# Allegro board Transceiver.brd
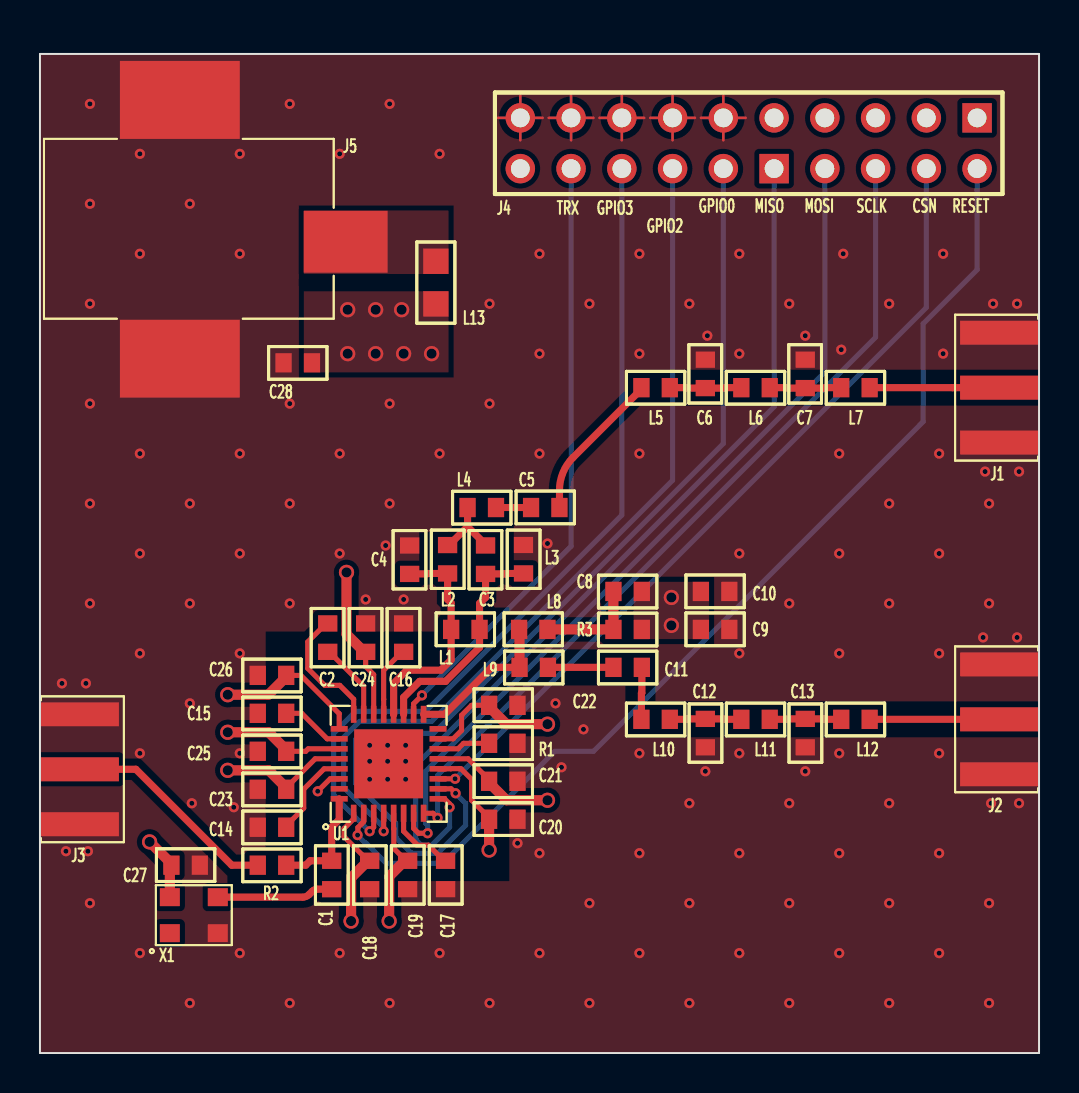
[diagram p0: board, top side]
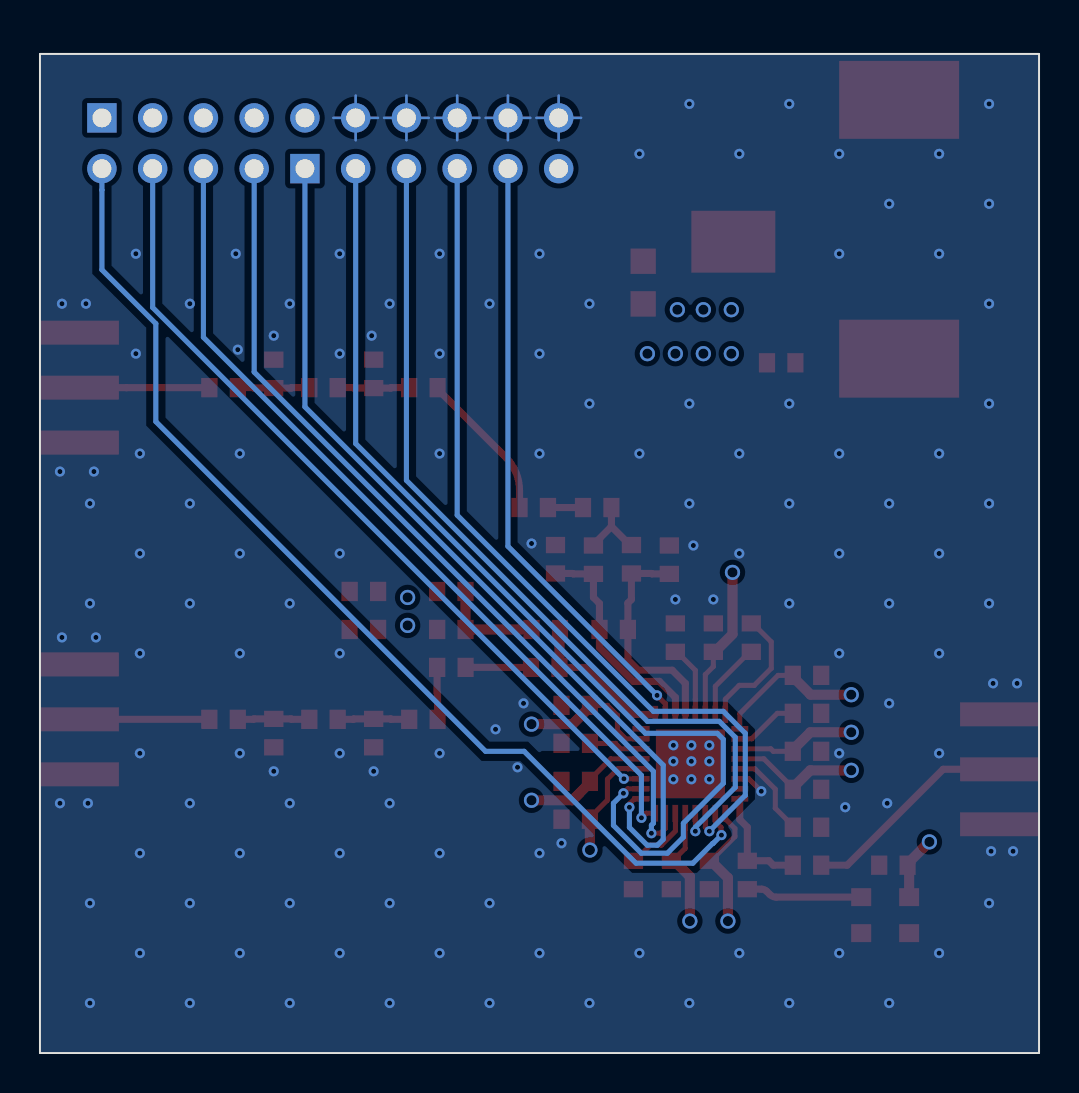
[diagram p1: board, bottom side, seen from below]

Outline 50 x 50 mm; copper layers: TOP, INNER 1, INNER 2, BOTTOM. Coordinates in mm from the lower left corner of the outline.
Outline path: 0,50 0,0 50,0 50,50 0,50

## Design rules (mm)
constraint set DEFAULT: min track width 0.127

## Placement (name value [footprint] x y rotation side)
C1  22p  [SMC0603]  14.6 8.2 90 top
C2  1.5n  [SMC0603]  14.4 21.5 270 top
C3  5.1p  [SMC0603]  22.3 25.4 270 top
C4  5.1p  [SMC0603]  18.5 25.4 270 top
C5  5.1p  [SMC0603]  26 27.3 180 top
C6  6.8p  [SMC0603]  33.3 34.7 270 top
C7  6.8p  [SMC0603]  38.3 34.7 270 top
C8  56p  [SMC0603]  28.7 23.1 0 top
C9  100p  [SMC0603]  34.5 21.2 180 top
C10  10n  [SMC0603]  34.5 23.1 180 top
C11  39p  [SMC0603]  28.7 19.3 0 top
C12  6.8p  [SMC0603]  33.3 15.3 90 top
C13  6.8p  [SMC0603]  38.3 15.3 90 top
C14  47n  [SMC0603]  10.9 11.3 0 top
C15  47n  [SMC0603]  10.9 17 0 top
C16  10n  [SMC0603]  18.2 21.5 270 top
C17  220n  [SMC0603]  20.3 8.2 90 top
C18  47n  [SMC0603]  16.5 8.2 90 top
C19  47n  [SMC0603]  18.4 8.2 90 top
C20  47n  [SMC0603]  23.9 11.7 180 top
C21  47n  [SMC0603]  23.9 13.6 180 top
C22  47n  [SMC0603]  23.9 17.4 180 top
C23  47n  [SMC0603]  10.9 13.2 0 top
C24  47n  [SMC0603]  16.3 21.5 270 top
C25  47n  [SMC0603]  10.9 15.1 0 top
C26  47n  [SMC0603]  10.9 18.9 0 top
C27  100n  [SMC0603]  8 9.4 180 top
C28  2.2u  [SMC0603]  12.19 34.54 0 top
J1  SMA_EDGE  [CON_SMA_EDGE]  48 33.3 180 top
J2  SMA_EDGE  [CON_SMA_EDGE]  48 16.7 180 top
J3  SMA_EDGE  [CON_SMA_EDGE]  2 14.2 0 top
J4  CON20A  [BLKCON100VHTM2OEW20020]  46.9 46.8 180 top
J5  -  [PJ-036AH-SMT-TR]  15.3 40.6 0 top
L1  56n  [SMC0603]  22 21.2 180 top
L2  27n  [SMC0603]  20.4 24 90 top
L3  27n  [SMC0603]  24.2 24 90 top
L4  15n  [SMC0603]  21.4 27.3 0 top
L5  18n  [SMC0603]  30.1 33.3 0 top
L6  39n  [SMC0603]  35.1 33.3 0 top
L7  21n  [SMC0603]  40.1 33.3 0 top
L8  56n  [SMC0603]  25.4 21.2 180 top
L9  15n  [SMC0603]  24 19.3 0 top
L10  21n  [SMC0603]  30.1 16.7 0 top
L11  39n  [SMC0603]  35.1 16.7 0 top
L12  18n  [SMC0603]  40.1 16.7 0 top
L13  BLM21PG221SN1D  [SMC0805]  19.81 39.62 270 top
R1  56k  [SMC0603]  23.9 15.5 180 top
R2  0  [SMC0603]  10.9 9.4 0 top
R3  18  [SMC0603]  28.7 21.2 0 top
U1  CC1200  [QFN_5X5_32P]  15.7 12 90 top
X1  TXETBLSANF-40.000000  [TXETBLSANF]  6.5 6 0 top

## Library data of the parts
C1-C28 = C
J1-J3 = SMA_EDGE
J4 = CON20A
J5 = PJ-036AH-SMT-TR
L1-L13 = L_0
R1-R3 = R
U1 = CC1200_1
X1 = TXETBLSANF-40_0.000000

## Footprints (pads in the part's own frame, mm; a bottom-side part is the same pattern mirrored in y, then rotated)
BLKCON100VHTM2OEW20020
  rect 1.473x1.473 hole 0.94: 1(0,0) 10(10.16,2.54)
  round 1.473 hole 0.94: 2(0,2.54) 3(2.54,0) 4(2.54,2.54) 5(5.08,0) 6(5.08,2.54) 7(7.62,0) 8(7.62,2.54) 9(10.16,0) 11(12.7,0) 12(12.7,2.54) 13(15.24,0) 14(15.24,2.54) 15(17.78,0) 16(17.78,2.54) 17(20.32,0) 18(20.32,2.54) 19(22.86,0) 20(22.86,2.54)
CON_SMA_EDGE
  rect 3.9x1.2 smd: 1(0,0) 2(0,-2.75) 3(0,2.75)
PJ-036AH-SMT-TR
  rect 4.2x3.1 smd: 1(0,0)
  rect 6x3.9 smd: 2(-8.301,7.099) 3(-8.301,-5.85)
QFN_5X5_32P
  rect 0.85x0.28 smd: 1(0,0) 2(0,-0.5) 3(0,-1.001) 4(0,-1.501) 5(0,-1.999) 6(0,-2.499) 7(0,-3) 8(0,-3.5) 17(4.951,-3.5) 18(4.951,-3) 19(4.951,-2.499) 20(4.951,-1.999) 21(4.951,-1.501) 22(4.951,-1.001) 23(4.951,-0.5) 24(4.951,0)
  rect 0.28x0.85 smd: 9(0.724,-4.224) 10(1.224,-4.224) 11(1.725,-4.224) 12(2.225,-4.224) 13(2.725,-4.224) 14(3.226,-4.224) 15(3.726,-4.224) 16(4.224,-4.224) 25(4.224,0.724) 26(3.726,0.724) 27(3.226,0.724) 28(2.725,0.724) 29(2.225,0.724) 30(1.725,0.724) 31(1.224,0.724) 32(0.724,0.724)
  rect 3.45x3.45 smd: 33(2.474,-1.75)
SMC0603
  rect 0.813x0.965 smd: 1(0,0) 2(1.422,0)
SMC0805
  rect 1.27x1.27 smd: 1(0,0) 2(2.134,0)
TXETBLSANF
  rect 1x0.9 smd: 1(0,0) 2(2.4,0) 3(2.4,1.801) 4(0,1.801)

## Nets
GND: C4.1 C6.1 C7.1 C9.1 C10.1 C12.1 C13.1 C14.1 C15.1 C16.1 C17.1 C18.1 C19.1 C20.1 C21.1 C22.1 C23.1 C24.1 C25.1 C26.1 C27.1 C28.1 J1.2 J1.3(SHEILD2) J2.2 J2.3(SHEILD2) J3.2 J3.3(SHEILD2) J4.11 J4.13 J4.15 J4.17 J4.19 J5.2 J5.3(SHORT) L3.2 R1.1 U1.30 U1.33 X1.2
VDD_REG: C8.2 C9.2 C10.2 C18.2 C19.2 C20.2 C21.2 C22.2 C23.2 C24.2 C25.2 C26.2 C27.2 C28.2 J4.1 J4.3 J4.5 J4.7 J4.9 L13.2 R3.2 U1.1 U1.5 U1.12 U1.13 U1.15 U1.22 U1.25 U1.27 U1.28 X1.4(VCC)
CSN: J4.4 U1.11
GPIO0: J4.12 U1.10
GPIO2: J4.14 U1.4
GPIO3: J4.16 U1.3
MISO: J4.10 U1.9
MOSI: J4.8 U1.7
RESET: J4.2 U1.2
SCLK: J4.6 U1.8
TRX: J4.18 U1.18
N00387: R1.2 U1.14
N00495: C1.1 X1.3
N00499: C1.2 R2.2 U1.32
N00575: C2.2 U1.23
N00579: C2.1 U1.24
N00816: C4.2 L1.2 L2.1 U1.20
N00823: C3.2 L1.1 L3.1 U1.19
N01542: C3.1 L2.2 L4.1
N03488: C14.2 U1.29
N03496: C15.2 U1.26
N03504: C16.2 U1.21
N03512: C17.2 U1.6
N04822: C6.2 L5.2 L6.1
N04826: C7.2 L6.2 L7.1
N04983: L8.2 L9.1 U1.17
N05046: C8.1 L8.1 R3.1
N05969: C11.2 L10.1
N05973: C12.2 L10.2 L11.1
N05977: C13.2 L11.2 L12.1
N06789: J1.1 L7.2
N06823: J2.1 L12.2
N07312: J3.1 R2.1
N08614: C5.2 L4.2
N08703: C5.1 L5.1
N12367: C11.1 L9.2
N13547: J5.1 L13.1

Pads without a net: J4 20; U1 16 31; X1 1

## Via types
v1: diameter 0.508, hole 0.254, TOP to BOTTOM, 146 vias
v2: diameter 0.762, hole 0.508, TOP to BOTTOM, 19 vias

## Routing (per net, layer and track width the routed paths; a pad name or vN(x,y) marks a point on that pad's centre or on a via; arc(x,y) is an arc through that point)
GND: length 68.4
  TOP w0.127: 24.04,45.68 J4.19 ; J4.19 25.16,46.8 ; J4.19 22.92,46.8 ; J4.19 24.04,47.92 ; J4.17 26.58,47.92 ; J4.17 26.58,45.68 ; J4.17 27.7,46.8 ; J4.17 25.46,46.8 ; J4.13 31.66,47.92 ; J4.13 31.66,45.68 ; J4.13 32.78,46.8 ; J4.13 30.54,46.8 ; J4.11 34.2,47.92 ; J4.11 34.2,45.68 ; J4.11 33.08,46.8 ; J4.11 35.32,46.8 ; 28,46.8 J4.15 ; J4.15 29.12,45.68 ; J4.15 29.12,47.92 ; J4.15 30.24,46.8
  TOP w0.254: v1(13.9,13.1) 14.52,13.72 U1.30
  INNER 1 w0.127: 25.46,46.8 J4.17 ; J4.17 26.58,45.68 ; J4.17 26.58,47.92 ; J4.17 27.7,46.8 ; 24.04,45.68 J4.19 ; J4.19 22.92,46.8 ; J4.19 25.16,46.8 ; J4.19 24.04,47.92 ; 28,46.8 J4.15 ; J4.15 29.12,45.68 ; J4.15 29.12,47.92 ; J4.15 30.24,46.8 ; J4.13 31.66,47.92 ; J4.13 32.78,46.8 ; J4.13 31.66,45.68 ; J4.13 30.54,46.8 ; 33.08,46.8 J4.11 ; J4.11 34.2,45.68 ; J4.11 35.32,46.8 ; J4.11 34.2,47.92
  BOTTOM w0.127: 34.2,45.68 J4.11 ; J4.11 35.32,46.8 ; J4.11 34.2,47.92 ; J4.11 33.08,46.8 ; 25.46,46.8 J4.17 ; J4.17 27.7,46.8 ; J4.17 26.58,45.68 ; J4.17 26.58,47.92 ; J4.15 29.12,47.92 ; J4.15 29.12,45.68 ; J4.15 30.24,46.8 ; J4.15 28,46.8 ; 24.04,45.68 J4.19 ; J4.19 25.16,46.8 ; J4.19 24.04,47.92 ; J4.19 22.92,46.8 ; J4.13 31.66,47.92 ; J4.13 32.78,46.8 ; J4.13 31.66,45.68 ; J4.13 30.54,46.8
  vias: v1(1.1,18.5) v1(1.3,10.1) v1(2.3,18.5) v1(2.4,10.1) v1(2.5,47.5) v1(2.5,42.5) v1(2.5,37.5) v1(2.5,32.5) v1(2.5,27.5) v1(2.5,22.5) v1(2.5,7.5) v1(5,45) v1(5,40) v1(5,30) v1(5,25) v1(5,20) v1(5,15) v1(5,5) v1(7.5,42.5) v1(7.5,27.5) v1(7.5,22.5) v1(7.5,17.5) v1(7.5,2.5) v1(7.6,12.5) v1(9.7,12.3) v1(10,45) v1(10,40) v1(10,30) v1(10,25) v1(10,20) v1(10,15) v1(10,5) v1(12.5,47.5) v1(12.5,32.5) v1(12.5,27.5) v1(12.5,22.5) v1(12.5,2.5) v1(15,45) v1(15,30) v1(15,25) v1(15,5) v1(16.3,22.7) v1(16.5,15.4) v1(16.5,14.6) v1(16.5,13.7) v1(17.3,25.4) v1(17.4,15.4) v1(17.4,14.6) v1(17.4,13.7) v1(17.5,47.5) v1(17.5,32.5) v1(17.5,27.5) v1(17.5,2.5) v1(18.2,22.7) v1(18.3,15.4) v1(18.3,14.6) v1(18.3,13.7) v1(20,45) v1(20,30) v1(20,5) v1(22.5,37.5) v1(22.5,32.5) v1(22.5,2.5) v1(23.9,10.5) v1(25,40) v1(25,35) v1(25,30) v1(25,10) v1(25,5) v1(25.4,25.5) v1(25.8,17.5) v1(26.1,14.3) v1(27.2,16.2) v1(27.5,37.5) v1(27.5,7.5) v1(27.5,2.5) v1(30,40) v1(30,35) v1(30,30) v1(30,15) v1(30,10) v1(30,5) v1(32.5,37.5) v1(32.5,12.5) v1(32.5,7.5) v1(32.5,2.5) v1(33.3,14.1) v1(33.4,35.9) v1(35,40) v1(35,35) v1(35,25) v1(35,20) v1(35,15) v1(35,10) v1(35,5) v1(37.5,37.5) v1(37.5,22.5) v1(37.5,12.5) v1(37.5,7.5) v1(37.5,2.5) v1(38.3,35.9) v1(38.3,14.1) v1(40,30) v1(40,25) v1(40,20) v1(40,15) v1(40,10) v1(40,5) v1(40.1,35.2) v1(40.2,40) v1(42.5,37.5) v1(42.5,27.5) v1(42.5,22.5) v1(42.5,12.5) v1(42.5,7.5) v1(42.5,2.5) v1(45,30) v1(45,25) v1(45,20) v1(45,15) v1(45,10) v1(45,5) v1(45.2,40) v1(45.2,35) v1(47.2,20.8) v1(47.3,29.1) v1(47.5,27.5) v1(47.5,22.5) v1(47.5,7.5) v1(47.5,2.5) v1(47.6,12.5) v1(47.7,37.5) v1(48.9,37.5) v1(48.9,20.8) v1(49,29.1) v1(49,12.5)
VDD_REG: length 85.5
  TOP w0.254: C24.2 16.3,19.34 16.7,18.94 U1.22 ; C22.2 21.6,17.4 21.1,16.9 21.1,16.15 20.68,15.73 U1.15 ; 12.32,13.28 13.77,14.73 U1.28 ; 16.42,9.62 15.22,10.83 15.22,11.23 15.7,11.71 U1.1 ; U1.27 13.43,15.23 13.3,15.1 C25.2 ; C21.2 22.48,13.68 21.43,14.73 U1.13 ; 18.32,9.62 17.71,10.24 17.71,11.21 17.7,11.22 U1.5 ; C26.2 13.06,18.9 14.98,16.98 U1.25 ; U1.12 20.56,14.22 20.56,14.23 20.99,14.23 20.99,14.22 21.07,14.22 21.6,13.7 21.6,12.65 22.48,11.78 C20.2
  TOP w0.508: v2(25.4,12.65) 23.35,12.65 22.48,13.52 C21.2 ; v2(9.4,16.05) 11.45,16.05 12.32,15.18 C25.2 ; C22.2 22.48,17.32 23.34,16.46 v2(25.4,16.46) ; v2(15.34,24.05) 15.34,20.96 16.22,20.08 C24.2 ; C20.2 v2(22.48,10.16) ; X1.4 6.5,9.32 C27.2 6.58,9.48 v2(5.49,10.57) ; C23.2 12.32,13.28 11.45,14.15 v2(9.4,14.15) ; v2(9.4,17.93) 11.43,17.93 12.32,18.82 C26.2 ; C19.2 18.26,9.62 17.48,8.84 v2(17.48,6.6) ; v2(15.57,6.6) 15.57,8.77 16.42,9.62 C18.2
  INNER 2 w0.127: J4.7 39.28,47.92 ; J4.7 39.28,45.68 ; J4.7 38.16,46.8 ; J4.7 40.4,46.8 ; J4.1 46.9,47.92 ; J4.1 48.02,46.8 ; J4.1 46.9,45.68 ; J4.1 45.78,46.8 ; 40.7,46.8 J4.5 ; J4.5 41.82,47.92 ; J4.5 41.82,45.68 ; J4.5 42.94,46.8 ; 44.36,45.68 J4.3 ; J4.3 45.48,46.8 ; J4.3 43.24,46.8 ; J4.3 44.36,47.92 ; 35.62,46.8 J4.9 ; J4.9 36.74,47.92 ; J4.9 36.74,45.68 ; J4.9 37.86,46.8
  vias: v2(15.4,37.2) v2(15.4,35) v2(16.8,37.2) v2(16.8,35) v2(18.1,37.2) v2(18.2,35) v2(19.6,35) v2(31.6,22.8) v2(31.6,21.4)
CSN: length 41.2
  TOP w0.254: U1.11 v1(20.78,13.72)
  BOTTOM w0.254: J4.4 44.36,37.31 v1(20.78,13.72)
GPIO0: length 51.2
  TOP w0.254: v1(20.8,13) 20.58,13.22 U1.10
  BOTTOM w0.254: v1(20.8,13) 21.3,12.5 21.3,11.39 19.91,10 18.6,10 17.8,10.8 17.8,11.5 15.8,13.5 15.8,15.7 16.1,16 19.7,16 34.2,30.5 J4.12
GPIO2: length 43.8
  TOP w0.254: U1.4 v1(17.2,11.1)
  BOTTOM w0.254: v1(17.2,11.1) 17.2,11.3 15.2,13.3 15.2,15.8 16,16.6 19.6,16.6 31.66,28.66 J4.14
GPIO3: length 42.9
  TOP w0.254: v1(16.5,11.1) 16.7,11.3 U1.3
  BOTTOM w0.254: J4.16 29.12,26.92 19.3,17.1 15.8,17.1 14.7,16 14.7,12.9 v1(16.5,11.1)
MISO: length 45
  TOP w0.254: v1(20.5,12.3) 20.5,12.47 20.25,12.72 U1.9
  BOTTOM w0.254: J4.10 36.74,32.34 18.81,14.41 18.81,10.69 19.1,10.4 19.61,10.4 20.5,11.29 v1(20.5,12.3)
MOSI: length 43.1
  TOP w0.254: v1(19.4,11) 18.94,11 18.7,11.24 U1.7
  BOTTOM w0.254: v1(19.4,11) 19.4,11.4 19.3,11.5 19.3,14.1 39.28,34.08 J4.8
RESET: length 53
  TOP w0.254: v1(15.9,10.91) 15.91,10.92 15.91,11.29 16.09,11.47 16.2,11.58 U1.2
  BOTTOM w0.254: v1(15.9,10.91) 16.31,10.49 16.33,10.49 17.32,9.5 20.17,9.5 25.77,15.1 27.7,15.1 44.2,31.6 44.2,36.5 46.9,39.2 46.9,43.19 J4.2
SCLK: length 42.4
  TOP w0.254: U1.8 19.67,12 v1(19.9,11.77)
  BOTTOM w0.254: J4.6 41.82,35.82 19.9,13.9 v1(19.9,11.77)
TRX: length 30.6
  TOP w0.254: U1.18 18.7,17.48 v1(19.12,17.9)
  BOTTOM w0.254: v1(19.12,17.9) 26.58,25.36 J4.18
N00387: length 2.7
  TOP w0.254: R1.2 21.2,15.5 20.93,15.23 U1.14
N00495: length 5.8
  TOP w0.356: C1.1 13.88,8.2 arc(13.75,8.17) 13.63,8.1 13.47,7.93 arc(13.32,7.84) 13.15,7.8 X1.3
N00499: length 5.6
  TOP w0.356: R2.2 13.3,9.4 13.52,9.62 C1.2 14.6,11.3 14.98,11.68 U1.32
N00575: length 3.9
  TOP w0.254: C2.2 14.48,20.08 16.2,18.35 U1.23
N00579: length 6.4
  TOP w0.254: C2.1 14.32,21.5 13.4,20.58 13.4,19.25 14.25,18.4 15.01,18.4 15.7,17.71 U1.24
N00816: length 11.2
  TOP w0.356: C4.2 19.36,23.98 19.39,24 L2.1 20.4,22.7 20.58,22.52 L1.2 20.58,19.68 20.06,19.16 18.36,19.16 17.7,18.5 17.7,16.95 U1.20
N00823: length 11.4
  TOP w0.356: U1.19 18.2,17.8 19,18.6 20.3,18.6 22,20.3 L1.1 22,22.5 22.3,22.8 C3.2 23.31,23.98 23.34,24 L3.1
N01542: length 3.7
  TOP w0.356: C3.1 22.3,25.45 21.4,26.35 ; 21.4,26.35 20.48,25.42 L2.2 ; 21.4,26.35 L4.1
N03488: length 4.5
  TOP w0.254: U1.29 14.22,14.22 13.2,13.2 13.2,12.25 12.32,11.38 C14.2
N03496: length 3.2
  TOP w0.254: U1.26 14.37,15.73 13.1,17 C15.2
N03504: length 3.6
  TOP w0.254: U1.21 17.2,17.71 17.2,17.71 17.2,19.15 18.12,20.08 C16.2
N03512: length 3.6
  TOP w0.254: C17.2 20.22,9.62 19.45,10.4 18.9,10.4 18.2,11.1 U1.6
N04822: length 3.6
  TOP w0.356: L6.1 34.31,33.3 34.29,33.28 C6.2 32.44,33.28 32.41,33.3 L5.2
N04826: length 3.6
  TOP w0.356: L7.1 39.31,33.3 39.29,33.28 C7.2 37.44,33.28 37.41,33.3 L6.2
N04983: length 7.7
  TOP w0.356: L9.1 22.6,19.3 20.25,16.95 U1.17
  TOP w0.508: L8.2 24,21.18 L9.1
N05046: length 5.2
  TOP w0.508: C8.1 R3.1 L8.1
N05969: length 2.6
  TOP w0.356: C11.2 30.12,18.02 30.1,18 L10.1
N05973: length 3.6
  TOP w0.356: L10.2 32.41,16.7 32.44,16.72 C12.2 34.29,16.72 34.31,16.7 L11.1
N05977: length 3.6
  TOP w0.356: L12.1 39.31,16.7 39.29,16.72 C13.2 37.44,16.72 37.41,16.7 L11.2
N06789: length 6.5
  TOP w0.356: J1.1 45.67,33.3 L7.2
N06823: length 6.5
  TOP w0.356: L12.2 J2.1
N07312: length 10.9
  TOP w0.356: R2.1 9.6,9.4 4.8,14.2 J3.1
N08614: length 1.8
  TOP w0.356: L4.2 C5.2
N08703: length 7.6
  TOP w0.356: C5.1 26,28.16 arc(26.18,29.05) 26.68,29.8 30.1,33.22 L5.1
N12367: length 3.3
  TOP w0.356: L9.2 C11.1

## Copper pours and planes (outline as drawn; the poured copper is in the pictures)
GND on TOP: 21.56,24.38 21.6,24.51 21.69,24.6 21.74,24.69 21.69,24.78 21.6,24.87 21.56,24.99 21.56,25.43 21.4,25.59 21.14,25.33 21.14,25.02 21.1,24.89 21.01,24.8 20.96,24.71 21.01,24.62 21.1,24.53 21.14,24.41 21.14,23.59 21.09,23.45 20.97,23.35 20.93,23.34 20.93,22.92 21.11,22.74 21.11,21.09 11.3,21.09 11.3,8.88 9.38,8.88 9.38,8.2 13.37,8.2 13.37,8.61 23.49,8.61 23.49,18.4 29.3,18.4 29.3,15.8 50,15.8 50,0 0,0 0,50 50,50 50,34.2 29.3,34.2 29.3,32.4 50,32.4 50,17.6 30.8,17.6 30.8,20.2 23.49,20.2 23.49,22.3 21.47,22.3 21.47,22.72 21.77,23.02 21.77,23.32 21.73,23.33 21.61,23.42 21.56,23.57 ; 3 cut-outs
GND on BOTTOM: 0,0 0,50 50,50 50,0 ; 2 cut-outs
GND on INNER 1: 0.64,0.64 0.64,49.53 49.53,49.53 49.53,0.64
VDD_REG on TOP: 29.72,23.58 29.72,20.72 33.48,20.72 33.48,23.58
VDD_REG on TOP: 20.45,38.13 20.45,34.06 13.21,34.06 13.21,38.13
VDD_REG on INNER 2: 0.64,0.64 0.64,49.53 49.53,49.53 49.53,0.64
N13547 on TOP: 20.45,42.16 20.45,38.99 13.21,38.99 13.21,42.16

## Text on the board
Ref Des/Silkscreen Top: TRX | GPIO3 | GPIO2 | GPIO0 | MISO | MOSI | SCLK | CSN | RESET
